# Altium PCB 02_UNROUTED_REFINED_PLACEMENT.PcbDoc (part 4 of 5)
Units mil, origin at the board's own origin, x right, y up, seen from the top; angles counter-clockwise.
Board outline 3149.61 x 1771.65 mil, 4 copper layers (L1 TOP, L2 GND, L3 POWER SIGNAL, L4 BOTTOM GND), stack 45.835 mil thick; 209 components, 132 nets, 761 pads, 5 vias.
Unrouted connection lines stored in the file: 548.
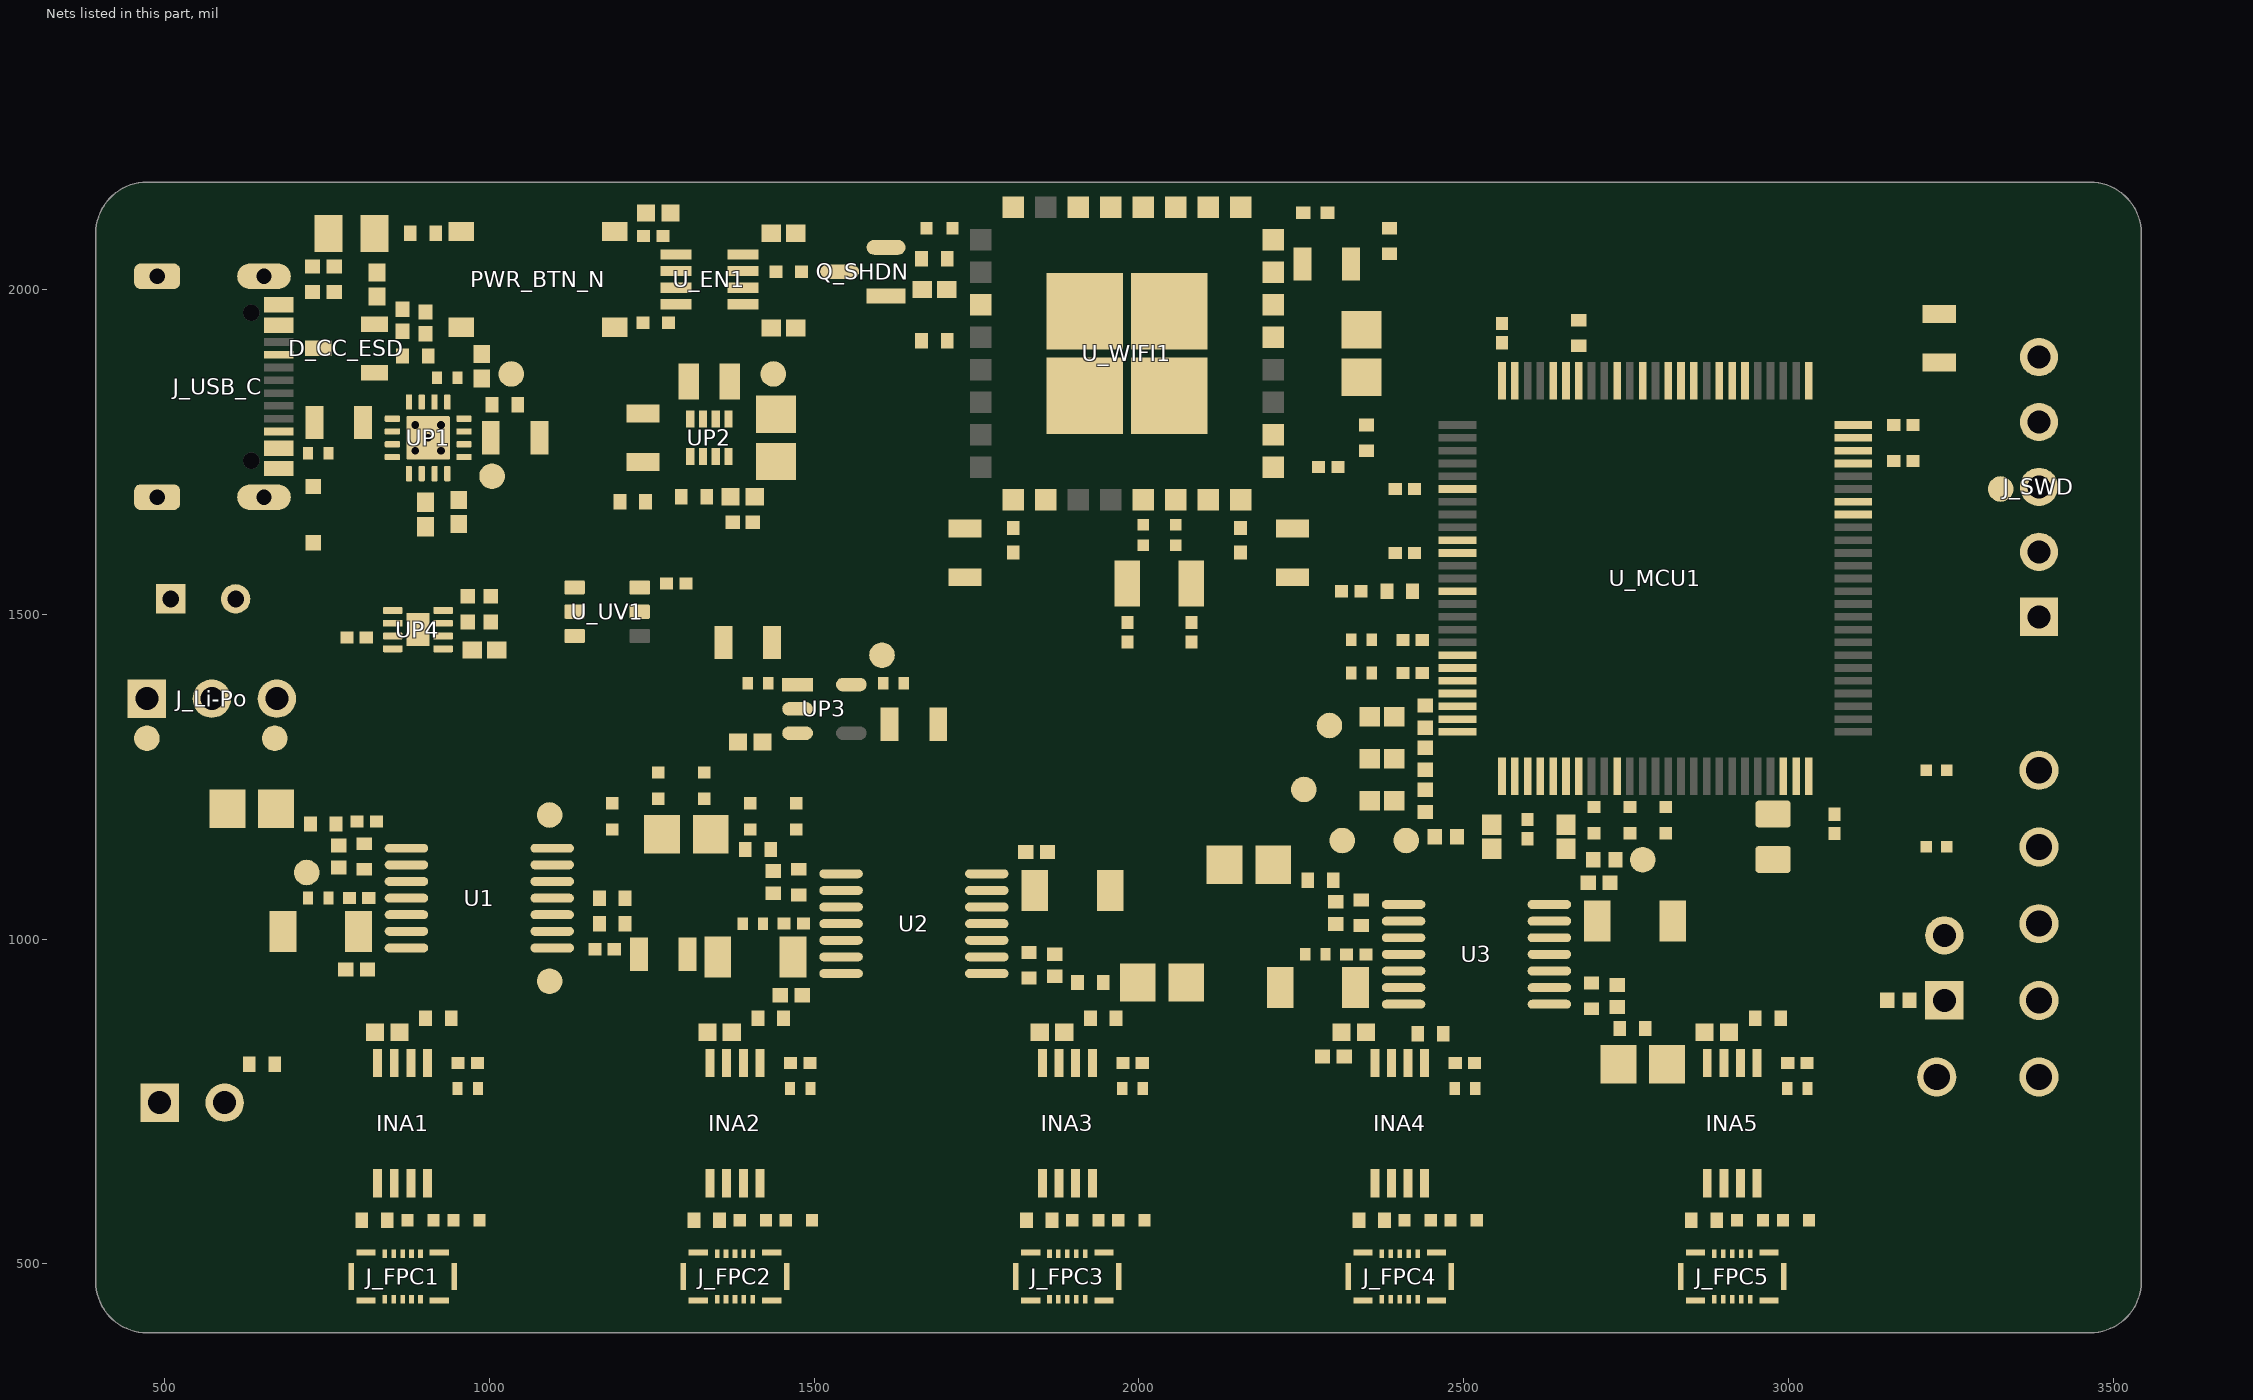
[diagram p2: the nets of this part, all layers, seen from the top]

## Part data (continued)
R_TS_TOP: library part EMG_R5_R_TS_TOP, Manufacturer="Yageo / Phycomp", Controlled Revision="R5 2026-09-16; project-local frozen symbol/footprint", Part Number=RC0402FR0733K2L
R_VREF1: library part EMG_R5_R_VREF1, Package=None, Availability=Unavailable, Controlled Revision="R5 2026-09-16; project-local frozen symbol/footprint", MP=ERA2AEB680X, Price=None
R_VREF2: library part EMG_R5_R_VREF2, Package=None, Availability=Unavailable, Controlled Revision="R5 2026-09-16; project-local frozen symbol/footprint", MP=ERA2AEB680X, Price=None
R_VREF3: library part EMG_R5_R_VREF3, Package=None, Availability=Unavailable, Controlled Revision="R5 2026-09-16; project-local frozen symbol/footprint", MP=ERA2AEB680X, Price=None
R_VREF4: library part EMG_R5_R_VREF4, Package=None, Availability=Unavailable, Controlled Revision="R5 2026-09-16; project-local frozen symbol/footprint", MP=ERA2AEB680X, Price=None
R_VREF5: library part EMG_R5_R_VREF5, Package=None, Availability=Unavailable, Controlled Revision="R5 2026-09-16; project-local frozen symbol/footprint", MP=ERA2AEB680X, Price=None
R_WIFI_BOOT_OVR: library part EMG_R5_R_WIFI_BOOT_OVR, "1K Ohm 1/16W Thick Film Resistor 0402 Chip - Surface Mount", Package="0402-2 ROYAL", Check_prices=https://www.snapeda.com/parts/0402WGF1001TCE/Uni-Royal/view-part/?ref=eda, Controlled Revision="R5 2026-09-16; project-local frozen symbol/footprint", MF=Uni-Royal, MP=0402WGF1001TCE, SnapEDA_Link=https://www.snapeda.com/parts/0402WGF1001TCE/Uni-Royal/view-part/?ref=snap
R_WIFI_BOOT_PD: library part EMG_R5_R_WIFI_BOOT_PD, "RES 10.0K OHM 1/16W .1% SMD 0402", Manufacturer=Yageo, Package=RT0402, Power Rating=0.063W, Resistance=10KΩ, Temperature="-55°C to +155°C", Temperature Coefficient="25 ppm/°C", Temperature Range High=+155°C, Temperature Range Low=-55°C, Tolerance=0.001, Voltage Rating=50V, Automotive=No, Category=Res, ComponentLink2Description=Datasheet, ComponentLink2URL=http://www.yageo.com/documents/recent/PYu-RT_1-to-0.01_RoHS_L_9.pdf, Composition="Thin Film", Controlled Revision="R5 2026-09-16; project-local frozen symbol/footprint", Device Class L1="Passive Components", Device Class L2=Resistors, Device Class L3="Chip SMD Resistors", Digikey Description="RES 10.0K OHM 1/16W .1% SMD 0402", Footprint Url=http://www.yageo.com/exep/pages/download/literatures/PYu-R_Mount_10.pdf, Height=0.35mm, Ipc Land Pattern Name=RESC10050X30, Lead Free=Yes, Manufacturer Part Number=RT0402BRD0710KL, Mouser Description="Thin Film Resistors - SMD 10K ohm 0.1% 1/16W", Octopart=https://octopart.com/rt0402brd0710kl-yageo-1181432, RoHS=TRUE, Series=RT
R_WIFI_CS_PD: library part EMG_R5_R_WIFI_CS_PD, "RES 10.0K OHM 1/16W .1% SMD 0402", Manufacturer=Yageo, Package=RT0402, Power Rating=0.063W, Resistance=10KΩ, Temperature="-55°C to +155°C", Temperature Coefficient="25 ppm/°C", Temperature Range High=+155°C, Temperature Range Low=-55°C, Tolerance=0.001, Voltage Rating=50V, Automotive=No, Category=Res, ComponentLink2Description=Datasheet, ComponentLink2URL=http://www.yageo.com/documents/recent/PYu-RT_1-to-0.01_RoHS_L_9.pdf, Composition="Thin Film", Controlled Revision="R5 2026-09-16; project-local frozen symbol/footprint", Device Class L1="Passive Components", Device Class L2=Resistors, Device Class L3="Chip SMD Resistors", Digikey Description="RES 10.0K OHM 1/16W .1% SMD 0402", Footprint Url=http://www.yageo.com/exep/pages/download/literatures/PYu-R_Mount_10.pdf, Height=0.35mm, Ipc Land Pattern Name=RESC10050X30, Lead Free=Yes, Manufacturer Part Number=RT0402BRD0710KL, Mouser Description="Thin Film Resistors - SMD 10K ohm 0.1% 1/16W", Octopart=https://octopart.com/rt0402brd0710kl-yageo-1181432, RoHS=TRUE, Series=RT
R_WIFI_EN_PD: library part EMG_R5_R_WIFI_EN_PD, "RES 10.0K OHM 1/16W .1% SMD 0402", Manufacturer=Yageo, Package=RT0402, Power Rating=0.063W, Resistance=10KΩ, Temperature="-55°C to +155°C", Temperature Coefficient="25 ppm/°C", Temperature Range High=+155°C, Temperature Range Low=-55°C, Tolerance=0.001, Voltage Rating=50V, Automotive=No, Category=Res, ComponentLink2Description=Datasheet, ComponentLink2URL=http://www.yageo.com/documents/recent/PYu-RT_1-to-0.01_RoHS_L_9.pdf, Composition="Thin Film", Controlled Revision="R5 2026-09-16; project-local frozen symbol/footprint", Device Class L1="Passive Components", Device Class L2=Resistors, Device Class L3="Chip SMD Resistors", Digikey Description="RES 10.0K OHM 1/16W .1% SMD 0402", Footprint Url=http://www.yageo.com/exep/pages/download/literatures/PYu-R_Mount_10.pdf, Height=0.35mm, Ipc Land Pattern Name=RESC10050X30, Lead Free=Yes, Manufacturer Part Number=RT0402BRD0710KL, Mouser Description="Thin Film Resistors - SMD 10K ohm 0.1% 1/16W", Octopart=https://octopart.com/rt0402brd0710kl-yageo-1181432, RoHS=TRUE, Series=RT
R_WIFI_UART_RX_LINK: library part EMG_R5_R_WIFI_UART_RX_LINK, "Chip Resistor, 0 Ohm, 0.1 W, -55 to 155 degC, 0402 (1005 Metric), RoHS, Tape and Reel", Case Code (Imperial)=0402, Case Code (Metric)=1005, Manufacturer=Panasonic, Max Operating Temperature=155degC, Max Power Dissipation=100mW, Min Operating Temperature=-55degC, Package Description="2-Pin Surface Mount Device, Body 1 x 0.5 mm", Package Quantity=1, Package Reference=402, Resistance=0mOhm, Temperature Coefficient=600ppm/��C, Tolerance=5%, Voltage Rating=50V, Case/Package=0402, Composition=ThickFilm, Contact Plating=Tin, Controlled Revision="R5 2026-09-16; project-local frozen symbol/footprint", Datasheet URL=https://industrial.panasonic.com/cdbs/www-data/pdf/RDA0000/AOA0000C301.pdf, Datasheet Version=03/2015, Depth=0.5mm, Height=0.35mm, Lead Free=LeadFree, Length=1mm, Manufacturer URL=http://www.panasonic.com/, Military Standard=Not, Mount=SurfaceMount, Mounting Technology=SurfaceMount, Number of Terminations=2, Packaging=TapeandReel, Power Rating=100mW, Radiation Hardening=No, REACH SVHC=NoSVHC, RoHSCompliant=True, Termination=SMD/SMT, Voltage Rating (DC)=50V, Width=0.02inch
R_WIFI_UART_TX_LINK: library part EMG_R5_R_WIFI_UART_TX_LINK, "Chip Resistor, 0 Ohm, 0.1 W, -55 to 155 degC, 0402 (1005 Metric), RoHS, Tape and Reel", Case Code (Imperial)=0402, Case Code (Metric)=1005, Manufacturer=Panasonic, Max Operating Temperature=155degC, Max Power Dissipation=100mW, Min Operating Temperature=-55degC, Package Description="2-Pin Surface Mount Device, Body 1 x 0.5 mm", Package Quantity=1, Package Reference=402, Resistance=0mOhm, Temperature Coefficient=600ppm/��C, Tolerance=5%, Voltage Rating=50V, Case/Package=0402, Composition=ThickFilm, Contact Plating=Tin, Controlled Revision="R5 2026-09-16; project-local frozen symbol/footprint", Datasheet URL=https://industrial.panasonic.com/cdbs/www-data/pdf/RDA0000/AOA0000C301.pdf, Datasheet Version=03/2015, Depth=0.5mm, Height=0.35mm, Lead Free=LeadFree, Length=1mm, Manufacturer URL=http://www.panasonic.com/, Military Standard=Not, Mount=SurfaceMount, Mounting Technology=SurfaceMount, Number of Terminations=2, Packaging=TapeandReel, Power Rating=100mW, Radiation Hardening=No, REACH SVHC=NoSVHC, RoHSCompliant=True, Termination=SMD/SMT, Voltage Rating (DC)=50V, Width=0.02inch
R_WIFI_X32_IN: library part EMG_R5_R_WIFI_X32_IN, "Chip Resistor, 0 Ohm, 0.1 W, -55 to 155 degC, 0402 (1005 Metric), RoHS, Tape and Reel", Case Code (Imperial)=0402, Case Code (Metric)=1005, Manufacturer=Panasonic, Max Operating Temperature=155degC, Max Power Dissipation=100mW, Min Operating Temperature=-55degC, Package Description="2-Pin Surface Mount Device, Body 1 x 0.5 mm", Package Quantity=1, Package Reference=402, Resistance=0mOhm, Temperature Coefficient=600ppm/��C, Tolerance=5%, Voltage Rating=50V, Case/Package=0402, Composition=ThickFilm, Contact Plating=Tin, Controlled Revision="R5 2026-09-16; project-local frozen symbol/footprint", Datasheet URL=https://industrial.panasonic.com/cdbs/www-data/pdf/RDA0000/AOA0000C301.pdf, Datasheet Version=03/2015, Depth=0.5mm, Height=0.35mm, Lead Free=LeadFree, Length=1mm, Manufacturer URL=http://www.panasonic.com/, Military Standard=Not, Mount=SurfaceMount, Mounting Technology=SurfaceMount, Number of Terminations=2, Packaging=TapeandReel, Power Rating=100mW, Radiation Hardening=No, REACH SVHC=NoSVHC, RoHSCompliant=True, Termination=SMD/SMT, Voltage Rating (DC)=50V, Width=0.02inch
R_WIFI_X32_OUT: library part EMG_R5_R_WIFI_X32_OUT, "Chip Resistor, 0 Ohm, 0.1 W, -55 to 155 degC, 0402 (1005 Metric), RoHS, Tape and Reel", Case Code (Imperial)=0402, Case Code (Metric)=1005, Manufacturer=Panasonic, Max Operating Temperature=155degC, Max Power Dissipation=100mW, Min Operating Temperature=-55degC, Package Description="2-Pin Surface Mount Device, Body 1 x 0.5 mm", Package Quantity=1, Package Reference=402, Resistance=0mOhm, Temperature Coefficient=600ppm/��C, Tolerance=5%, Voltage Rating=50V, Case/Package=0402, Composition=ThickFilm, Contact Plating=Tin, Controlled Revision="R5 2026-09-16; project-local frozen symbol/footprint", Datasheet URL=https://industrial.panasonic.com/cdbs/www-data/pdf/RDA0000/AOA0000C301.pdf, Datasheet Version=03/2015, Depth=0.5mm, Height=0.35mm, Lead Free=LeadFree, Length=1mm, Manufacturer URL=http://www.panasonic.com/, Military Standard=Not, Mount=SurfaceMount, Mounting Technology=SurfaceMount, Number of Terminations=2, Packaging=TapeandReel, Power Rating=100mW, Radiation Hardening=No, REACH SVHC=NoSVHC, RoHSCompliant=True, Termination=SMD/SMT, Voltage Rating (DC)=50V, Width=0.02inch
RDD1: library part EMG_R5_RDD1, Package=None, Availability=Unavailable, Controlled Revision="R5 2026-09-16; project-local frozen symbol/footprint", MP=ERA2ARB103X, Price=None
RDD2: library part EMG_R5_RDD2, "-55℃~+155℃ 50V 5kΩ 63mW Thin Film Resistor ±0.1% ±25ppm/℃ 0402 Chip Resistor - Surface Mount ROH", LCSC Part=C5948099, Manufacturer="Viking Tech", Package=AR0402, Power Rating=0.0625W, Resistance=5KΩ, Temperature="-55°C to +155°C", Temperature Range High=+155°C, Temperature Range Low=-55°C, Tolerance=±0.1%, Voltage Rating=50V, Automotive=No, Automotive Grade="Grade 0", Category="Resistors/Chip Resistor - Surface Mount", ComponentLink2Description=Datasheet, ComponentLink2URL=https://www.viking.com.tw/Templates/att/Thin%20Film%20Resistor%20short%20form.pdf, Composition="Thin Film", Controlled Revision="R5 2026-09-16; project-local frozen symbol/footprint", Device Class L1="Passive Components", Device Class L2=Resistors, Device Class L3="Chip SMD Resistors", Footprint Url=https://www.viking.com.tw/Templates/att/Thin%20Film%20Resistor%20short%20form.pdf, Height=0.35mm, Ipc Land Pattern Name=RESC10050X32, Lead Free=Yes, Manufacturer Part Number=AR02BTC5001, Octopart=https://octopart.com/datasheet/viking-tech/AR02BTC5001, RoHS=TRUE, Series=AR
RDD3: library part EMG_R5_RDD3, Package=None, Availability=Unavailable, Controlled Revision="R5 2026-09-16; project-local frozen symbol/footprint", MP=ERA2ARB103X, Price=None
RDD4: library part EMG_R5_RDD4, Package=None, Availability=Unavailable, Controlled Revision="R5 2026-09-16; project-local frozen symbol/footprint", MP=ERA2ARB103X, Price=None
RDD5: library part EMG_R5_RDD5, "-55℃~+155℃ 50V 5kΩ 63mW Thin Film Resistor ±0.1% ±25ppm/℃ 0402 Chip Resistor - Surface Mount ROH", LCSC Part=C5948099, Manufacturer="Viking Tech", Package=AR0402, Power Rating=0.0625W, Resistance=5KΩ, Temperature="-55°C to +155°C", Temperature Range High=+155°C, Temperature Range Low=-55°C, Tolerance=±0.1%, Voltage Rating=50V, Automotive=No, Automotive Grade="Grade 0", Category="Resistors/Chip Resistor - Surface Mount", ComponentLink2Description=Datasheet, ComponentLink2URL=https://www.viking.com.tw/Templates/att/Thin%20Film%20Resistor%20short%20form.pdf, Composition="Thin Film", Controlled Revision="R5 2026-09-16; project-local frozen symbol/footprint", Device Class L1="Passive Components", Device Class L2=Resistors, Device Class L3="Chip SMD Resistors", Footprint Url=https://www.viking.com.tw/Templates/att/Thin%20Film%20Resistor%20short%20form.pdf, Height=0.35mm, Ipc Land Pattern Name=RESC10050X32, Lead Free=Yes, Manufacturer Part Number=AR02BTC5001, Octopart=https://octopart.com/datasheet/viking-tech/AR02BTC5001, RoHS=TRUE, Series=AR
RDD6: library part EMG_R5_RDD6, Package=None, Availability=Unavailable, Controlled Revision="R5 2026-09-16; project-local frozen symbol/footprint", MP=ERA2ARB103X, Price=None
RDD7: library part EMG_R5_RDD7, Package=None, Availability=Unavailable, Controlled Revision="R5 2026-09-16; project-local frozen symbol/footprint", MP=ERA2ARB103X, Price=None
RDD8: library part EMG_R5_RDD8, "-55℃~+155℃ 50V 5kΩ 63mW Thin Film Resistor ±0.1% ±25ppm/℃ 0402 Chip Resistor - Surface Mount ROH", LCSC Part=C5948099, Manufacturer="Viking Tech", Package=AR0402, Power Rating=0.0625W, Resistance=5KΩ, Temperature="-55°C to +155°C", Temperature Range High=+155°C, Temperature Range Low=-55°C, Tolerance=±0.1%, Voltage Rating=50V, Automotive=No, Automotive Grade="Grade 0", Category="Resistors/Chip Resistor - Surface Mount", ComponentLink2Description=Datasheet, ComponentLink2URL=https://www.viking.com.tw/Templates/att/Thin%20Film%20Resistor%20short%20form.pdf, Composition="Thin Film", Controlled Revision="R5 2026-09-16; project-local frozen symbol/footprint", Device Class L1="Passive Components", Device Class L2=Resistors, Device Class L3="Chip SMD Resistors", Footprint Url=https://www.viking.com.tw/Templates/att/Thin%20Film%20Resistor%20short%20form.pdf, Height=0.35mm, Ipc Land Pattern Name=RESC10050X32, Lead Free=Yes, Manufacturer Part Number=AR02BTC5001, Octopart=https://octopart.com/datasheet/viking-tech/AR02BTC5001, RoHS=TRUE, Series=AR
RDD9: library part EMG_R5_RDD9, Package=None, Availability=Unavailable, Controlled Revision="R5 2026-09-16; project-local frozen symbol/footprint", MP=ERA2ARB103X, Price=None
RDD10: library part EMG_R5_RDD10, Package=None, Availability=Unavailable, Controlled Revision="R5 2026-09-16; project-local frozen symbol/footprint", MP=ERA2ARB103X, Price=None
RDD11: library part EMG_R5_RDD11, "-55℃~+155℃ 50V 5kΩ 63mW Thin Film Resistor ±0.1% ±25ppm/℃ 0402 Chip Resistor - Surface Mount ROH", LCSC Part=C5948099, Manufacturer="Viking Tech", Package=AR0402, Power Rating=0.0625W, Resistance=5KΩ, Temperature="-55°C to +155°C", Temperature Range High=+155°C, Temperature Range Low=-55°C, Tolerance=±0.1%, Voltage Rating=50V, Automotive=No, Automotive Grade="Grade 0", Category="Resistors/Chip Resistor - Surface Mount", ComponentLink2Description=Datasheet, ComponentLink2URL=https://www.viking.com.tw/Templates/att/Thin%20Film%20Resistor%20short%20form.pdf, Composition="Thin Film", Controlled Revision="R5 2026-09-16; project-local frozen symbol/footprint", Device Class L1="Passive Components", Device Class L2=Resistors, Device Class L3="Chip SMD Resistors", Footprint Url=https://www.viking.com.tw/Templates/att/Thin%20Film%20Resistor%20short%20form.pdf, Height=0.35mm, Ipc Land Pattern Name=RESC10050X32, Lead Free=Yes, Manufacturer Part Number=AR02BTC5001, Octopart=https://octopart.com/datasheet/viking-tech/AR02BTC5001, RoHS=TRUE, Series=AR
RDD12: library part EMG_R5_RDD12, Package=None, Availability=Unavailable, Controlled Revision="R5 2026-09-16; project-local frozen symbol/footprint", MP=ERA2ARB103X, Price=None
RDD13: library part EMG_R5_RDD13, Package=None, Availability=Unavailable, Controlled Revision="R5 2026-09-16; project-local frozen symbol/footprint", MP=ERA2ARB103X, Price=None
RDD14: library part EMG_R5_RDD14, "-55℃~+155℃ 50V 5kΩ 63mW Thin Film Resistor ±0.1% ±25ppm/℃ 0402 Chip Resistor - Surface Mount ROH", LCSC Part=C5948099, Manufacturer="Viking Tech", Package=AR0402, Power Rating=0.0625W, Resistance=5KΩ, Temperature="-55°C to +155°C", Temperature Range High=+155°C, Temperature Range Low=-55°C, Tolerance=±0.1%, Voltage Rating=50V, Automotive=No, Automotive Grade="Grade 0", Category="Resistors/Chip Resistor - Surface Mount", ComponentLink2Description=Datasheet, ComponentLink2URL=https://www.viking.com.tw/Templates/att/Thin%20Film%20Resistor%20short%20form.pdf, Composition="Thin Film", Controlled Revision="R5 2026-09-16; project-local frozen symbol/footprint", Device Class L1="Passive Components", Device Class L2=Resistors, Device Class L3="Chip SMD Resistors", Footprint Url=https://www.viking.com.tw/Templates/att/Thin%20Film%20Resistor%20short%20form.pdf, Height=0.35mm, Ipc Land Pattern Name=RESC10050X32, Lead Free=Yes, Manufacturer Part Number=AR02BTC5001, Octopart=https://octopart.com/datasheet/viking-tech/AR02BTC5001, RoHS=TRUE, Series=AR
RDD15: library part EMG_R5_RDD15, Package=None, Availability=Unavailable, Controlled Revision="R5 2026-09-16; project-local frozen symbol/footprint", MP=ERA2ARB103X, Price=None
RG_1: library part EMG_R5_RG_1, "RES SMD 80.6KOHM 0.1% 1/16W 0402", Manufacturer=Yageo, Package=RT0402, Power Rating=0.063W, Resistance=80.6KΩ, Temperature="-55°C to +155°C", Temperature Coefficient="25 ppm/°C", Temperature Range High=+155°C, Temperature Range Low=-55°C, Tolerance=0.001, Voltage Rating=50V, Automotive=No, Category=Res, ComponentLink2Description=Datasheet, ComponentLink2URL=http://www.yageo.com/documents/recent/PYu-RT_1-to-0.01_RoHS_L_9.pdf, Composition="Thin Film", Controlled Revision="R5 2026-09-16; project-local frozen symbol/footprint", Device Class L1="Passive Components", Device Class L2=Resistors, Device Class L3="Chip SMD Resistors", Digikey Description="RES SMD 80.6KOHM 0.1% 1/16W 0402", Footprint Url=http://www.yageo.com/exep/pages/download/literatures/PYu-R_Mount_10.pdf, Height=0.35mm, Ipc Land Pattern Name=RESC10050X30, Lead Free=Yes, Manufacturer Part Number=RT0402BRD0780K6L, Mouser Description="Thin Film Resistors 1/16W 80.6K ohm .1% 25ppm", Octopart=https://octopart.com/rt0402brd0780k6l-yageo-1468076, RoHS=TRUE, Series=RT
RG_2: library part EMG_R5_RG_2, "RES SMD 80.6KOHM 0.1% 1/16W 0402", Manufacturer=Yageo, Package=RT0402, Power Rating=0.063W, Resistance=80.6KΩ, Temperature="-55°C to +155°C", Temperature Coefficient="25 ppm/°C", Temperature Range High=+155°C, Temperature Range Low=-55°C, Tolerance=0.001, Voltage Rating=50V, Automotive=No, Category=Res, ComponentLink2Description=Datasheet, ComponentLink2URL=http://www.yageo.com/documents/recent/PYu-RT_1-to-0.01_RoHS_L_9.pdf, Composition="Thin Film", Controlled Revision="R5 2026-09-16; project-local frozen symbol/footprint", Device Class L1="Passive Components", Device Class L2=Resistors, Device Class L3="Chip SMD Resistors", Digikey Description="RES SMD 80.6KOHM 0.1% 1/16W 0402", Footprint Url=http://www.yageo.com/exep/pages/download/literatures/PYu-R_Mount_10.pdf, Height=0.35mm, Ipc Land Pattern Name=RESC10050X30, Lead Free=Yes, Manufacturer Part Number=RT0402BRD0780K6L, Mouser Description="Thin Film Resistors 1/16W 80.6K ohm .1% 25ppm", Octopart=https://octopart.com/rt0402brd0780k6l-yageo-1468076, RoHS=TRUE, Series=RT
RG_3: library part EMG_R5_RG_3, "RES SMD 80.6KOHM 0.1% 1/16W 0402", Manufacturer=Yageo, Package=RT0402, Power Rating=0.063W, Resistance=80.6KΩ, Temperature="-55°C to +155°C", Temperature Coefficient="25 ppm/°C", Temperature Range High=+155°C, Temperature Range Low=-55°C, Tolerance=0.001, Voltage Rating=50V, Automotive=No, Category=Res, ComponentLink2Description=Datasheet, ComponentLink2URL=http://www.yageo.com/documents/recent/PYu-RT_1-to-0.01_RoHS_L_9.pdf, Composition="Thin Film", Controlled Revision="R5 2026-09-16; project-local frozen symbol/footprint", Device Class L1="Passive Components", Device Class L2=Resistors, Device Class L3="Chip SMD Resistors", Digikey Description="RES SMD 80.6KOHM 0.1% 1/16W 0402", Footprint Url=http://www.yageo.com/exep/pages/download/literatures/PYu-R_Mount_10.pdf, Height=0.35mm, Ipc Land Pattern Name=RESC10050X30, Lead Free=Yes, Manufacturer Part Number=RT0402BRD0780K6L, Mouser Description="Thin Film Resistors 1/16W 80.6K ohm .1% 25ppm", Octopart=https://octopart.com/rt0402brd0780k6l-yageo-1468076, RoHS=TRUE, Series=RT
RG_4: library part EMG_R5_RG_4, "RES SMD 80.6KOHM 0.1% 1/16W 0402", Manufacturer=Yageo, Package=RT0402, Power Rating=0.063W, Resistance=80.6KΩ, Temperature="-55°C to +155°C", Temperature Coefficient="25 ppm/°C", Temperature Range High=+155°C, Temperature Range Low=-55°C, Tolerance=0.001, Voltage Rating=50V, Automotive=No, Category=Res, ComponentLink2Description=Datasheet, ComponentLink2URL=http://www.yageo.com/documents/recent/PYu-RT_1-to-0.01_RoHS_L_9.pdf, Composition="Thin Film", Controlled Revision="R5 2026-09-16; project-local frozen symbol/footprint", Device Class L1="Passive Components", Device Class L2=Resistors, Device Class L3="Chip SMD Resistors", Digikey Description="RES SMD 80.6KOHM 0.1% 1/16W 0402", Footprint Url=http://www.yageo.com/exep/pages/download/literatures/PYu-R_Mount_10.pdf, Height=0.35mm, Ipc Land Pattern Name=RESC10050X30, Lead Free=Yes, Manufacturer Part Number=RT0402BRD0780K6L, Mouser Description="Thin Film Resistors 1/16W 80.6K ohm .1% 25ppm", Octopart=https://octopart.com/rt0402brd0780k6l-yageo-1468076, RoHS=TRUE, Series=RT
RG_5: library part EMG_R5_RG_5, "RES SMD 80.6KOHM 0.1% 1/16W 0402", Manufacturer=Yageo, Package=RT0402, Power Rating=0.063W, Resistance=80.6KΩ, Temperature="-55°C to +155°C", Temperature Coefficient="25 ppm/°C", Temperature Range High=+155°C, Temperature Range Low=-55°C, Tolerance=0.001, Voltage Rating=50V, Automotive=No, Category=Res, ComponentLink2Description=Datasheet, ComponentLink2URL=http://www.yageo.com/documents/recent/PYu-RT_1-to-0.01_RoHS_L_9.pdf, Composition="Thin Film", Controlled Revision="R5 2026-09-16; project-local frozen symbol/footprint", Device Class L1="Passive Components", Device Class L2=Resistors, Device Class L3="Chip SMD Resistors", Digikey Description="RES SMD 80.6KOHM 0.1% 1/16W 0402", Footprint Url=http://www.yageo.com/exep/pages/download/literatures/PYu-R_Mount_10.pdf, Height=0.35mm, Ipc Land Pattern Name=RESC10050X30, Lead Free=Yes, Manufacturer Part Number=RT0402BRD0780K6L, Mouser Description="Thin Film Resistors 1/16W 80.6K ohm .1% 25ppm", Octopart=https://octopart.com/rt0402brd0780k6l-yageo-1468076, RoHS=TRUE, Series=RT
RGN_1: library part EMG_R5_RGN_1, "RES 10.0K OHM 1/16W .1% SMD 0402", Manufacturer=Yageo, Package=RT0402, Power Rating=0.063W, Resistance=10KΩ, Temperature="-55°C to +155°C", Temperature Coefficient="25 ppm/°C", Temperature Range High=+155°C, Temperature Range Low=-55°C, Tolerance=0.001, Voltage Rating=50V, Automotive=No, Category=Res, ComponentLink2Description=Datasheet, ComponentLink2URL=http://www.yageo.com/documents/recent/PYu-RT_1-to-0.01_RoHS_L_9.pdf, Composition="Thin Film", Controlled Revision="R5 2026-09-16; project-local frozen symbol/footprint", Device Class L1="Passive Components", Device Class L2=Resistors, Device Class L3="Chip SMD Resistors", Digikey Description="RES 10.0K OHM 1/16W .1% SMD 0402", Footprint Url=http://www.yageo.com/exep/pages/download/literatures/PYu-R_Mount_10.pdf, Height=0.35mm, Ipc Land Pattern Name=RESC10050X30, Lead Free=Yes, Manufacturer Part Number=RT0402BRD0710KL, Mouser Description="Thin Film Resistors - SMD 10K ohm 0.1% 1/16W", Octopart=https://octopart.com/rt0402brd0710kl-yageo-1181432, RoHS=TRUE, Series=RT
RGN_2: library part EMG_R5_RGN_2, "RES 10.0K OHM 1/16W .1% SMD 0402", Manufacturer=Yageo, Package=RT0402, Power Rating=0.063W, Resistance=10KΩ, Temperature="-55°C to +155°C", Temperature Coefficient="25 ppm/°C", Temperature Range High=+155°C, Temperature Range Low=-55°C, Tolerance=0.001, Voltage Rating=50V, Automotive=No, Category=Res, ComponentLink2Description=Datasheet, ComponentLink2URL=http://www.yageo.com/documents/recent/PYu-RT_1-to-0.01_RoHS_L_9.pdf, Composition="Thin Film", Controlled Revision="R5 2026-09-16; project-local frozen symbol/footprint", Device Class L1="Passive Components", Device Class L2=Resistors, Device Class L3="Chip SMD Resistors", Digikey Description="RES 10.0K OHM 1/16W .1% SMD 0402", Footprint Url=http://www.yageo.com/exep/pages/download/literatures/PYu-R_Mount_10.pdf, Height=0.35mm, Ipc Land Pattern Name=RESC10050X30, Lead Free=Yes, Manufacturer Part Number=RT0402BRD0710KL, Mouser Description="Thin Film Resistors - SMD 10K ohm 0.1% 1/16W", Octopart=https://octopart.com/rt0402brd0710kl-yageo-1181432, RoHS=TRUE, Series=RT
RGN_3: library part EMG_R5_RGN_3, "RES 10.0K OHM 1/16W .1% SMD 0402", Manufacturer=Yageo, Package=RT0402, Power Rating=0.063W, Resistance=10KΩ, Temperature="-55°C to +155°C", Temperature Coefficient="25 ppm/°C", Temperature Range High=+155°C, Temperature Range Low=-55°C, Tolerance=0.001, Voltage Rating=50V, Automotive=No, Category=Res, ComponentLink2Description=Datasheet, ComponentLink2URL=http://www.yageo.com/documents/recent/PYu-RT_1-to-0.01_RoHS_L_9.pdf, Composition="Thin Film", Controlled Revision="R5 2026-09-16; project-local frozen symbol/footprint", Device Class L1="Passive Components", Device Class L2=Resistors, Device Class L3="Chip SMD Resistors", Digikey Description="RES 10.0K OHM 1/16W .1% SMD 0402", Footprint Url=http://www.yageo.com/exep/pages/download/literatures/PYu-R_Mount_10.pdf, Height=0.35mm, Ipc Land Pattern Name=RESC10050X30, Lead Free=Yes, Manufacturer Part Number=RT0402BRD0710KL, Mouser Description="Thin Film Resistors - SMD 10K ohm 0.1% 1/16W", Octopart=https://octopart.com/rt0402brd0710kl-yageo-1181432, RoHS=TRUE, Series=RT
RGN_4: library part EMG_R5_RGN_4, "RES 10.0K OHM 1/16W .1% SMD 0402", Manufacturer=Yageo, Package=RT0402, Power Rating=0.063W, Resistance=10KΩ, Temperature="-55°C to +155°C", Temperature Coefficient="25 ppm/°C", Temperature Range High=+155°C, Temperature Range Low=-55°C, Tolerance=0.001, Voltage Rating=50V, Automotive=No, Category=Res, ComponentLink2Description=Datasheet, ComponentLink2URL=http://www.yageo.com/documents/recent/PYu-RT_1-to-0.01_RoHS_L_9.pdf, Composition="Thin Film", Controlled Revision="R5 2026-09-16; project-local frozen symbol/footprint", Device Class L1="Passive Components", Device Class L2=Resistors, Device Class L3="Chip SMD Resistors", Digikey Description="RES 10.0K OHM 1/16W .1% SMD 0402", Footprint Url=http://www.yageo.com/exep/pages/download/literatures/PYu-R_Mount_10.pdf, Height=0.35mm, Ipc Land Pattern Name=RESC10050X30, Lead Free=Yes, Manufacturer Part Number=RT0402BRD0710KL, Mouser Description="Thin Film Resistors - SMD 10K ohm 0.1% 1/16W", Octopart=https://octopart.com/rt0402brd0710kl-yageo-1181432, RoHS=TRUE, Series=RT
RGN_5: library part EMG_R5_RGN_5, "RES 10.0K OHM 1/16W .1% SMD 0402", Manufacturer=Yageo, Package=RT0402, Power Rating=0.063W, Resistance=10KΩ, Temperature="-55°C to +155°C", Temperature Coefficient="25 ppm/°C", Temperature Range High=+155°C, Temperature Range Low=-55°C, Tolerance=0.001, Voltage Rating=50V, Automotive=No, Category=Res, ComponentLink2Description=Datasheet, ComponentLink2URL=http://www.yageo.com/documents/recent/PYu-RT_1-to-0.01_RoHS_L_9.pdf, Composition="Thin Film", Controlled Revision="R5 2026-09-16; project-local frozen symbol/footprint", Device Class L1="Passive Components", Device Class L2=Resistors, Device Class L3="Chip SMD Resistors", Digikey Description="RES 10.0K OHM 1/16W .1% SMD 0402", Footprint Url=http://www.yageo.com/exep/pages/download/literatures/PYu-R_Mount_10.pdf, Height=0.35mm, Ipc Land Pattern Name=RESC10050X30, Lead Free=Yes, Manufacturer Part Number=RT0402BRD0710KL, Mouser Description="Thin Film Resistors - SMD 10K ohm 0.1% 1/16W", Octopart=https://octopart.com/rt0402brd0710kl-yageo-1181432, RoHS=TRUE, Series=RT
RH_1: library part EMG_R5_RH_1, "RES 26.1kΩ ±0.1% 0.063W 0402", Case Code (Imperial)=0402, Case Code (Metric)=1005, JLCPCB Part=C2075472, Manufacturer=PANASONIC, Max Operating Temperature=155°C, Max Power Dissipation=63mW, Min Operating Temperature=-55°C, Power Rating=62.5mW, Resistance=26.1kR, Resistor Type="Thin Film", Temperature Coefficient=25ppm/°C, Tolerance=0.1%, Voltage Rating=50V, Case/Package=0402, Controlled Revision="R5 2026-09-16; project-local frozen symbol/footprint", Features="Moisture Resistant", Height=0.015inch, Length=0.039inch, Number of Terminations=2, Packaging="Tape and Reel", RoHS Compliant=Yes, Series=ERA-2A, Termination=SMD/SMT, Width=0.5mm
RH_2: library part EMG_R5_RH_2, "RES 26.1kΩ ±0.1% 0.063W 0402", Case Code (Imperial)=0402, Case Code (Metric)=1005, JLCPCB Part=C2075472, Manufacturer=PANASONIC, Max Operating Temperature=155°C, Max Power Dissipation=63mW, Min Operating Temperature=-55°C, Power Rating=62.5mW, Resistance=26.1kR, Resistor Type="Thin Film", Temperature Coefficient=25ppm/°C, Tolerance=0.1%, Voltage Rating=50V, Case/Package=0402, Controlled Revision="R5 2026-09-16; project-local frozen symbol/footprint", Features="Moisture Resistant", Height=0.015inch, Length=0.039inch, Number of Terminations=2, Packaging="Tape and Reel", RoHS Compliant=Yes, Series=ERA-2A, Termination=SMD/SMT, Width=0.5mm
RH_3: library part EMG_R5_RH_3, "RES 26.1kΩ ±0.1% 0.063W 0402", Case Code (Imperial)=0402, Case Code (Metric)=1005, JLCPCB Part=C2075472, Manufacturer=PANASONIC, Max Operating Temperature=155°C, Max Power Dissipation=63mW, Min Operating Temperature=-55°C, Power Rating=62.5mW, Resistance=26.1kR, Resistor Type="Thin Film", Temperature Coefficient=25ppm/°C, Tolerance=0.1%, Voltage Rating=50V, Case/Package=0402, Controlled Revision="R5 2026-09-16; project-local frozen symbol/footprint", Features="Moisture Resistant", Height=0.015inch, Length=0.039inch, Number of Terminations=2, Packaging="Tape and Reel", RoHS Compliant=Yes, Series=ERA-2A, Termination=SMD/SMT, Width=0.5mm
RH_4: library part EMG_R5_RH_4, "RES 26.1kΩ ±0.1% 0.063W 0402", Case Code (Imperial)=0402, Case Code (Metric)=1005, JLCPCB Part=C2075472, Manufacturer=PANASONIC, Max Operating Temperature=155°C, Max Power Dissipation=63mW, Min Operating Temperature=-55°C, Power Rating=62.5mW, Resistance=26.1kR, Resistor Type="Thin Film", Temperature Coefficient=25ppm/°C, Tolerance=0.1%, Voltage Rating=50V, Case/Package=0402, Controlled Revision="R5 2026-09-16; project-local frozen symbol/footprint", Features="Moisture Resistant", Height=0.015inch, Length=0.039inch, Number of Terminations=2, Packaging="Tape and Reel", RoHS Compliant=Yes, Series=ERA-2A, Termination=SMD/SMT, Width=0.5mm
RH_5: library part EMG_R5_RH_5, "RES 26.1kΩ ±0.1% 0.063W 0402", Case Code (Imperial)=0402, Case Code (Metric)=1005, JLCPCB Part=C2075472, Manufacturer=PANASONIC, Max Operating Temperature=155°C, Max Power Dissipation=63mW, Min Operating Temperature=-55°C, Power Rating=62.5mW, Resistance=26.1kR, Resistor Type="Thin Film", Temperature Coefficient=25ppm/°C, Tolerance=0.1%, Voltage Rating=50V, Case/Package=0402, Controlled Revision="R5 2026-09-16; project-local frozen symbol/footprint", Features="Moisture Resistant", Height=0.015inch, Length=0.039inch, Number of Terminations=2, Packaging="Tape and Reel", RoHS Compliant=Yes, Series=ERA-2A, Termination=SMD/SMT, Width=0.5mm
RISET: library part EMG_R5_RISET, Manufacturer=Yageo, Controlled Revision="R5 2026-09-16; project-local frozen symbol/footprint", Part Number=RC0402FR-072K94L
RJ1: library part EMG_R5_RJ1, Manufacturer="Yageo / Phycomp", Controlled Revision="R5 2026-09-16; project-local frozen symbol/footprint", Part Number=RC0402FR-075K1L
RJ2: library part EMG_R5_RJ2, Manufacturer="Yageo / Phycomp", Controlled Revision="R5 2026-09-16; project-local frozen symbol/footprint", Part Number=RC0402FR-075K1L
RL_1: library part EMG_R5_RL_1, "RES SMD 1.07K OHM 0.1% 1/16W", Manufacturer=Yageo, Package=RT0402, Power Rating=0.063W, Resistance=1.07KΩ, Temperature="-55°C to +155°C", Temperature Coefficient="25 ppm/°C", Temperature Range High=+155°C, Temperature Range Low=-55°C, Tolerance=0.001, Voltage Rating=50V, Automotive=No, Category=Res, ComponentLink2Description=Datasheet, ComponentLink2URL=http://www.yageo.com/documents/recent/PYu-RT_1-to-0.01_RoHS_L_9.pdf, Composition="Thin Film", Controlled Revision="R5 2026-09-16; project-local frozen symbol/footprint", Device Class L1="Passive Components", Device Class L2=Resistors, Device Class L3="Chip SMD Resistors", Digikey Description="RES SMD 1.07K OHM 0.1% 1/16W", Footprint Url=http://www.yageo.com/exep/pages/download/literatures/PYu-R_Mount_10.pdf, Height=0.35mm, Ipc Land Pattern Name=RESC10050X30, Lead Free=Yes, Manufacturer Part Number=RT0402BRD071K07L, Mouser Description="Thin Film Resistors 1/16W 1.07K ohm .1% 25ppm", Octopart=https://octopart.com/rt0402brd071k07l-yageo-1400807, RoHS=TRUE, Series=RT
RL_2: library part EMG_R5_RL_2, "RES SMD 1.07K OHM 0.1% 1/16W", Manufacturer=Yageo, Package=RT0402, Power Rating=0.063W, Resistance=1.07KΩ, Temperature="-55°C to +155°C", Temperature Coefficient="25 ppm/°C", Temperature Range High=+155°C, Temperature Range Low=-55°C, Tolerance=0.001, Voltage Rating=50V, Automotive=No, Category=Res, ComponentLink2Description=Datasheet, ComponentLink2URL=http://www.yageo.com/documents/recent/PYu-RT_1-to-0.01_RoHS_L_9.pdf, Composition="Thin Film", Controlled Revision="R5 2026-09-16; project-local frozen symbol/footprint", Device Class L1="Passive Components", Device Class L2=Resistors, Device Class L3="Chip SMD Resistors", Digikey Description="RES SMD 1.07K OHM 0.1% 1/16W", Footprint Url=http://www.yageo.com/exep/pages/download/literatures/PYu-R_Mount_10.pdf, Height=0.35mm, Ipc Land Pattern Name=RESC10050X30, Lead Free=Yes, Manufacturer Part Number=RT0402BRD071K07L, Mouser Description="Thin Film Resistors 1/16W 1.07K ohm .1% 25ppm", Octopart=https://octopart.com/rt0402brd071k07l-yageo-1400807, RoHS=TRUE, Series=RT
RL_3: library part EMG_R5_RL_3, "RES SMD 1.07K OHM 0.1% 1/16W", Manufacturer=Yageo, Package=RT0402, Power Rating=0.063W, Resistance=1.07KΩ, Temperature="-55°C to +155°C", Temperature Coefficient="25 ppm/°C", Temperature Range High=+155°C, Temperature Range Low=-55°C, Tolerance=0.001, Voltage Rating=50V, Automotive=No, Category=Res, ComponentLink2Description=Datasheet, ComponentLink2URL=http://www.yageo.com/documents/recent/PYu-RT_1-to-0.01_RoHS_L_9.pdf, Composition="Thin Film", Controlled Revision="R5 2026-09-16; project-local frozen symbol/footprint", Device Class L1="Passive Components", Device Class L2=Resistors, Device Class L3="Chip SMD Resistors", Digikey Description="RES SMD 1.07K OHM 0.1% 1/16W", Footprint Url=http://www.yageo.com/exep/pages/download/literatures/PYu-R_Mount_10.pdf, Height=0.35mm, Ipc Land Pattern Name=RESC10050X30, Lead Free=Yes, Manufacturer Part Number=RT0402BRD071K07L, Mouser Description="Thin Film Resistors 1/16W 1.07K ohm .1% 25ppm", Octopart=https://octopart.com/rt0402brd071k07l-yageo-1400807, RoHS=TRUE, Series=RT
RL_4: library part EMG_R5_RL_4, "RES SMD 1.07K OHM 0.1% 1/16W", Manufacturer=Yageo, Package=RT0402, Power Rating=0.063W, Resistance=1.07KΩ, Temperature="-55°C to +155°C", Temperature Coefficient="25 ppm/°C", Temperature Range High=+155°C, Temperature Range Low=-55°C, Tolerance=0.001, Voltage Rating=50V, Automotive=No, Category=Res, ComponentLink2Description=Datasheet, ComponentLink2URL=http://www.yageo.com/documents/recent/PYu-RT_1-to-0.01_RoHS_L_9.pdf, Composition="Thin Film", Controlled Revision="R5 2026-09-16; project-local frozen symbol/footprint", Device Class L1="Passive Components", Device Class L2=Resistors, Device Class L3="Chip SMD Resistors", Digikey Description="RES SMD 1.07K OHM 0.1% 1/16W", Footprint Url=http://www.yageo.com/exep/pages/download/literatures/PYu-R_Mount_10.pdf, Height=0.35mm, Ipc Land Pattern Name=RESC10050X30, Lead Free=Yes, Manufacturer Part Number=RT0402BRD071K07L, Mouser Description="Thin Film Resistors 1/16W 1.07K ohm .1% 25ppm", Octopart=https://octopart.com/rt0402brd071k07l-yageo-1400807, RoHS=TRUE, Series=RT
RL_5: library part EMG_R5_RL_5, "RES SMD 1.07K OHM 0.1% 1/16W", Manufacturer=Yageo, Package=RT0402, Power Rating=0.063W, Resistance=1.07KΩ, Temperature="-55°C to +155°C", Temperature Coefficient="25 ppm/°C", Temperature Range High=+155°C, Temperature Range Low=-55°C, Tolerance=0.001, Voltage Rating=50V, Automotive=No, Category=Res, ComponentLink2Description=Datasheet, ComponentLink2URL=http://www.yageo.com/documents/recent/PYu-RT_1-to-0.01_RoHS_L_9.pdf, Composition="Thin Film", Controlled Revision="R5 2026-09-16; project-local frozen symbol/footprint", Device Class L1="Passive Components", Device Class L2=Resistors, Device Class L3="Chip SMD Resistors", Digikey Description="RES SMD 1.07K OHM 0.1% 1/16W", Footprint Url=http://www.yageo.com/exep/pages/download/literatures/PYu-R_Mount_10.pdf, Height=0.35mm, Ipc Land Pattern Name=RESC10050X30, Lead Free=Yes, Manufacturer Part Number=RT0402BRD071K07L, Mouser Description="Thin Film Resistors 1/16W 1.07K ohm .1% 25ppm", Octopart=https://octopart.com/rt0402brd071k07l-yageo-1400807, RoHS=TRUE, Series=RT
Rservo_1: library part EMG_R5_Rservo_1, Manufacturer="Yageo / Phycomp", Controlled Revision="R5 2026-09-16; project-local frozen symbol/footprint", Part Number=RC0402FR-072ML
Rservo_2: library part EMG_R5_Rservo_2, Manufacturer="Yageo / Phycomp", Controlled Revision="R5 2026-09-16; project-local frozen symbol/footprint", Part Number=RC0402FR-072ML
Rservo_3: library part EMG_R5_Rservo_3, Manufacturer="Yageo / Phycomp", Controlled Revision="R5 2026-09-16; project-local frozen symbol/footprint", Part Number=RC0402FR-072ML
Rservo_4: library part EMG_R5_Rservo_4, Manufacturer="Yageo / Phycomp", Controlled Revision="R5 2026-09-16; project-local frozen symbol/footprint", Part Number=RC0402FR-072ML
Rservo_5: library part EMG_R5_Rservo_5, Manufacturer="Yageo / Phycomp", Controlled Revision="R5 2026-09-16; project-local frozen symbol/footprint", Part Number=RC0402FR-072ML
RUP_3: library part EMG_R5_RUP_3, "RES 560kΩ ±1% 0.063W 0402", Case/Package=0402, Max Operating Temperature=155°C, Max Power Dissipation=63mW, Min Operating Temperature=-55°C, Resistance=560kR, Resistor Type="Thick Film", Temperature Coefficient=100ppm/°C, Tolerance=1%, Controlled Revision="R5 2026-09-16; project-local frozen symbol/footprint", Features="Moisture Resistant", Height=0.015inch, Length=0.039inch, Number of Terminations=2, Packaging="Tape and Reel", RoHS Compliant=Yes, Series=AC, Width=0.02inch
RUP_4: library part EMG_R5_RUP_4, "AC0402 100KΩ 0.0625W 1.00%", Manufacturer=Yageo, Package=AC0402, Power Rating=0.0625W, Resistance=100KΩ, Temperature="-55°C to +155°C", Temperature Range High=+155°C, Temperature Range Low=-55°C, Tolerance=0.01, Voltage Rating=50V, Automotive=Yes, Automotive Grade="Grade 0", Category=Res, ComponentLink2Description=Datasheet, ComponentLink2URL=http://www.yageo.com/documents/recent/PYu-AC_51_RoHS_L_6.pdf, Composition="Thick Film", Controlled Revision="R5 2026-09-16; project-local frozen symbol/footprint", Device Class L1="Passive Components", Device Class L2=Resistors, Device Class L3="Chip SMD Resistors", Footprint Url=http://www.yageo.com/exep/pages/download/literatures/PYu-R_Mount_10.pdf, Height=0.37mm, Ipc Land Pattern Name=RESC10050X32, Lead Free=Yes, Manufacturer Part Number=AC0402FR-7D100KL, Octopart=https://octopart.com/ac0402fr-7d100kl-yageo-91024821, RoHS=TRUE, Series=AC
RV1: library part EMG_R5_RV1, "AC0402 100KΩ 0.0625W 1.00%", Manufacturer=Yageo, Package=AC0402, Power Rating=0.0625W, Resistance=100KΩ, Temperature="-55°C to +155°C", Temperature Range High=+155°C, Temperature Range Low=-55°C, Tolerance=0.01, Voltage Rating=50V, Automotive=Yes, Automotive Grade="Grade 0", Category=Res, ComponentLink2Description=Datasheet, ComponentLink2URL=http://www.yageo.com/documents/recent/PYu-AC_51_RoHS_L_6.pdf, Composition="Thick Film", Controlled Revision="R5 2026-09-16; project-local frozen symbol/footprint", Device Class L1="Passive Components", Device Class L2=Resistors, Device Class L3="Chip SMD Resistors", Footprint Url=http://www.yageo.com/exep/pages/download/literatures/PYu-R_Mount_10.pdf, Height=0.37mm, Ipc Land Pattern Name=RESC10050X32, Lead Free=Yes, Manufacturer Part Number=AC0402FR-7D100KL, Octopart=https://octopart.com/ac0402fr-7d100kl-yageo-91024821, RoHS=TRUE, Series=AC
RV2: library part EMG_R5_RV2, "AC0402 100KΩ 0.0625W 1.00%", Manufacturer=Yageo, Package=AC0402, Power Rating=0.0625W, Resistance=100KΩ, Temperature="-55°C to +155°C", Temperature Range High=+155°C, Temperature Range Low=-55°C, Tolerance=0.01, Voltage Rating=50V, Automotive=Yes, Automotive Grade="Grade 0", Category=Res, ComponentLink2Description=Datasheet, ComponentLink2URL=http://www.yageo.com/documents/recent/PYu-AC_51_RoHS_L_6.pdf, Composition="Thick Film", Controlled Revision="R5 2026-09-16; project-local frozen symbol/footprint", Device Class L1="Passive Components", Device Class L2=Resistors, Device Class L3="Chip SMD Resistors", Footprint Url=http://www.yageo.com/exep/pages/download/literatures/PYu-R_Mount_10.pdf, Height=0.37mm, Ipc Land Pattern Name=RESC10050X32, Lead Free=Yes, Manufacturer Part Number=AC0402FR-7D100KL, Octopart=https://octopart.com/ac0402fr-7d100kl-yageo-91024821, RoHS=TRUE, Series=AC
TP_GND: library part EMG_R5_TP_GND, "UltraLow Profile THM Test Point-No Base", Package=None, Check_prices=https://www.snapeda.com/parts/5021/Keystone/view-part/?ref=eda, Controlled Revision="R5 2026-09-16; project-local frozen symbol/footprint", MF="Keystone Electronics", MP=5021, SnapEDA_Link=https://www.snapeda.com/parts/5021/Keystone/view-part/?ref=snap
TP_MCU_BOOT0: library part EMG_R5_TP_MCU_BOOT0, "UltraLow Profile THM Test Point-No Base", Package=None, Check_prices=https://www.snapeda.com/parts/5021/Keystone/view-part/?ref=eda, Controlled Revision="R5 2026-09-16; project-local frozen symbol/footprint", MF="Keystone Electronics", MP=5021, SnapEDA_Link=https://www.snapeda.com/parts/5021/Keystone/view-part/?ref=snap
TP_WIFI_BOOT: library part EMG_R5_TP_WIFI_BOOT, "UltraLow Profile THM Test Point-No Base", Package=None, Check_prices=https://www.snapeda.com/parts/5021/Keystone/view-part/?ref=eda, Controlled Revision="R5 2026-09-16; project-local frozen symbol/footprint", MF="Keystone Electronics", MP=5021, SnapEDA_Link=https://www.snapeda.com/parts/5021/Keystone/view-part/?ref=snap
TP_WIFI_CHIP_EN: library part EMG_R5_TP_WIFI_CHIP_EN, "UltraLow Profile THM Test Point-No Base", Package=None, Check_prices=https://www.snapeda.com/parts/5021/Keystone/view-part/?ref=eda, Controlled Revision="R5 2026-09-16; project-local frozen symbol/footprint", MF="Keystone Electronics", MP=5021, SnapEDA_Link=https://www.snapeda.com/parts/5021/Keystone/view-part/?ref=snap
TP_WIFI_UART_RX: library part EMG_R5_TP_WIFI_UART_RX, "UltraLow Profile THM Test Point-No Base", Package=None, Check_prices=https://www.snapeda.com/parts/5021/Keystone/view-part/?ref=eda, Controlled Revision="R5 2026-09-16; project-local frozen symbol/footprint", MF="Keystone Electronics", MP=5021, SnapEDA_Link=https://www.snapeda.com/parts/5021/Keystone/view-part/?ref=snap
TP_WIFI_UART_TX: library part EMG_R5_TP_WIFI_UART_TX, "UltraLow Profile THM Test Point-No Base", Package=None, Check_prices=https://www.snapeda.com/parts/5021/Keystone/view-part/?ref=eda, Controlled Revision="R5 2026-09-16; project-local frozen symbol/footprint", MF="Keystone Electronics", MP=5021, SnapEDA_Link=https://www.snapeda.com/parts/5021/Keystone/view-part/?ref=snap
U1: library part EMG_R5_U1, "None", Case/Package=TSSOP, Input Bias Current=100pA, Input Offset Voltage (Vos)=4.5mV, Max Operating Temperature=125°C, Max Supply Voltage=6V, Min Operating Temperature=-40°C, Min Supply Voltage=1.8V, Nominal Supply Current=45uA, Output Current=15mA, Power Supply Rejection Ratio (PSRR)=63dB, Voltage Gain=110dB, Amplifier Type="GENERAL PURPOSE", Common Mode Rejection Ratio=56dB, Controlled Revision="R5 2026-09-16; project-local frozen symbol/footprint", Gain Bandwidth Product=1MHz, Lead Free="Lead Free", Mount="Surface Mount", Number of Channels=4, Number of Circuits=4, Number of Elements=4, Number of Pins=14, Packaging="Tape and Reel", RoHS Compliant=Yes, Slew Rate=0.5V/µs, Supply Current=45uA, Technology=CMOS, Unity Gain Bandwidth Product=1MHz
U2: library part EMG_R5_U2, "None", Case/Package=TSSOP, Input Bias Current=100pA, Input Offset Voltage (Vos)=4.5mV, Max Operating Temperature=125°C, Max Supply Voltage=6V, Min Operating Temperature=-40°C, Min Supply Voltage=1.8V, Nominal Supply Current=45uA, Output Current=15mA, Power Supply Rejection Ratio (PSRR)=63dB, Voltage Gain=110dB, Amplifier Type="GENERAL PURPOSE", Common Mode Rejection Ratio=56dB, Controlled Revision="R5 2026-09-16; project-local frozen symbol/footprint", Gain Bandwidth Product=1MHz, Lead Free="Lead Free", Mount="Surface Mount", Number of Channels=4, Number of Circuits=4, Number of Elements=4, Number of Pins=14, Packaging="Tape and Reel", RoHS Compliant=Yes, Slew Rate=0.5V/µs, Supply Current=45uA, Technology=CMOS, Unity Gain Bandwidth Product=1MHz
U3: library part EMG_R5_U3, "None", Case/Package=TSSOP, Input Bias Current=100pA, Input Offset Voltage (Vos)=4.5mV, Max Operating Temperature=125°C, Max Supply Voltage=6V, Min Operating Temperature=-40°C, Min Supply Voltage=1.8V, Nominal Supply Current=45uA, Output Current=15mA, Power Supply Rejection Ratio (PSRR)=63dB, Voltage Gain=110dB, Amplifier Type="GENERAL PURPOSE", Common Mode Rejection Ratio=56dB, Controlled Revision="R5 2026-09-16; project-local frozen symbol/footprint", Gain Bandwidth Product=1MHz, Lead Free="Lead Free", Mount="Surface Mount", Number of Channels=4, Number of Circuits=4, Number of Elements=4, Number of Pins=14, Packaging="Tape and Reel", RoHS Compliant=Yes, Slew Rate=0.5V/µs, Supply Current=45uA, Technology=CMOS, Unity Gain Bandwidth Product=1MHz
U_EN1: library part EMG_R5_U_EN1, "Pushbutton On / Off  Controller with µP Interrupt, 8-pin SOT23 (TS8-8), -40 to 85 degC, Pb-Free, Mini Tape and Reel", Manufacturer="Linear Technology", Code_JEDEC=MO-193, ComponentLink1Description="Manufacturer URL", ComponentLink1URL=http://www.linear.com/, ComponentLink2Description=Datasheet, ComponentLink2URL=http://cds.linear.com/docs/en/datasheet/2954fb.pdf, ComponentLink3Description="Package Specification", ComponentLink3URL=http://cds.linear.com/docs/en/packaging/SOT_8_05-08-1637.pdf, Controlled Revision="R5 2026-09-16; project-local frozen symbol/footprint", DatasheetVersion="Rev. B", Mounting Technology="Surface Mount", Number of Supplies(#)=1, PackageDescription="8-Pin Plastic TSOT-23, Body 2.9 x 1.63 mm, Pitch 0.65 mm", PackageReference=TS8-8, PackageVersion="Rev. A, 08/2010", Packing="Mini Tape and Reel", PartNumber=LTC2954ITS8-1#TRMPBF, RoHS=TRUE
U_MCU1: library part EMG_R5_U_MCU1, "Integrated Circuit", Manufacturer_Name=STMicroelectronics, Mouser Part Number=511-STM32U575VIT6, Arrow Part Number=STM32U575VIT6, Arrow Price/Stock=https://www.arrow.com/en/products/stm32u575vit6/stmicroelectronics.html?utm_currency=USD&region=nac, Controlled Revision="R5 2026-09-16; project-local frozen symbol/footprint", Datasheet Link=https://www.st.com/resource/en/datasheet/stm32u575ag.pdf, Height=1.6mm, Manufacturer_Part_Number=STM32U575VIT6, Mouser Price/Stock=https://www.mouser.co.uk/ProductDetail/STMicroelectronics/STM32U575VIT6?qs=DRkmTr78QAR9I8TWG1L7Og%3D%3D
U_UV1: library part EMG_R5_U_UV1, "Low Quiescent Current, Programmable-Delay Supervisory Circuit, 1 Supply Monitored, -40 to 125 degC, 6-pin SOT-23 (DBV), Green (RoHS & no Sb/Br)", Manufacturer="Texas Instruments", Rating=Catalog, Threshold Voltage 1 (typ)(Typ)(V)=3.07, # of Supplies Monitored=1, Code_JEDEC=MO-178-AB*, ComponentLink1Description=Datasheet, ComponentLink1URL=http://www.ti.com/general/docs/lit/getliterature.tsp?genericPartNumber=TPS3808G33&fileType=pdf, Controlled Revision="R5 2026-09-16; project-local frozen symbol/footprint", DatasheetVersion=SBVS050J, Iq(Typ)(uA)=2.4, Mounting Technology="Surface Mount", Output Driver Type / Reset Output="Active-low, Open-drain", PackageDescription="6-Pin Plastic Small-Outline Package, 2.9 x 1.6 mm Body, 0.95 mm Pitch, 2.8 mm Lead Span", PackageReference=DBV0006A, PackageVersion="revK, Mar-2006", PartNumber=TPS3808G33DBVR, Reset Threshold Accuracy(%)=0.5, SubFamily="Supervisor and Reset IC", Time Delay(ms)=Programmable, VCC(Max)(V)=6.5, VCC(Min)(V)=1.7
U_WIFI1: library part EMG_R5_U_WIFI1, "Integrated Circuit", Manufacturer_Name=STMicroelectronics, Arrow Part Number=ST67W611M1A6BTR, Arrow Price/Stock=https://www.arrow.com/en/products/st67w611m1a6btr/stmicroelectronics.html?utm_currency=USD&region=nac, Controlled Revision="R5 2026-09-16; project-local frozen symbol/footprint", Datasheet Link=https://www.st.com/resource/en/datasheet/st67w611m1.pdf, Height=2.37mm, Manufacturer_Part_Number=ST67W611M1A6BTR
UP1: library part EMG_R5_UP1, "BQ24072T single-cell Li-ion charger with dynamic power path; OUT tracks battery +225mV with 3.4V minimum regulation under USB power", Manufacturer="Texas Instruments", Over Voltage Protection=N, Code_JEDEC=MO-220, ComponentLink1Description=Datasheet, ComponentLink1URL=http://www.ti.com/general/docs/lit/getliterature.tsp?genericPartNumber=BQ24072T&fileType=pdf, Controlled Revision="R5 2026-09-16; project-local frozen symbol/footprint", DatasheetVersion=SLUS937A, Eco-Plan="Green (RoHS & no Sb/Br)", Lead Acid=N, Li-Ion=Y, Li-Polymer=Y, Manufacturer Part Number=BQ24072TRGTR, Mounting Technology="Surface Mount", NiCd=N, NiMH=N, PackageDescription="16-Pin Plastic Quad Flat No-Lead, 3 x 3 mm Body, 0.5 mm Pitch, 1.7 x 1.7 mm Exposed Pad", PackageReference=RGT0016C, PackageVersion="revH, Oct-2011", PartNumber=BQ24072TRGTR, SubFamily="Battery Charge Management", Vin(Min)(V)=4.3
UP2: library part EMG_R5_UP2, "1.5-A output current, high-power-density buck-boost converter", Package="SOT-583 Texas Instruments", Check_prices=https://www.snapeda.com/parts/TPS631000DRLR/Texas+Instruments/view-part/?ref=eda, Controlled Revision="R5 2026-09-16; project-local frozen symbol/footprint", MF="Texas Instruments", MP=TPS631000DRLR, SnapEDA_Link=https://www.snapeda.com/parts/TPS631000DRLR/Texas+Instruments/view-part/?ref=snap